# EAGLE board final_rev_no_smd (EAGLE 9.5.2)
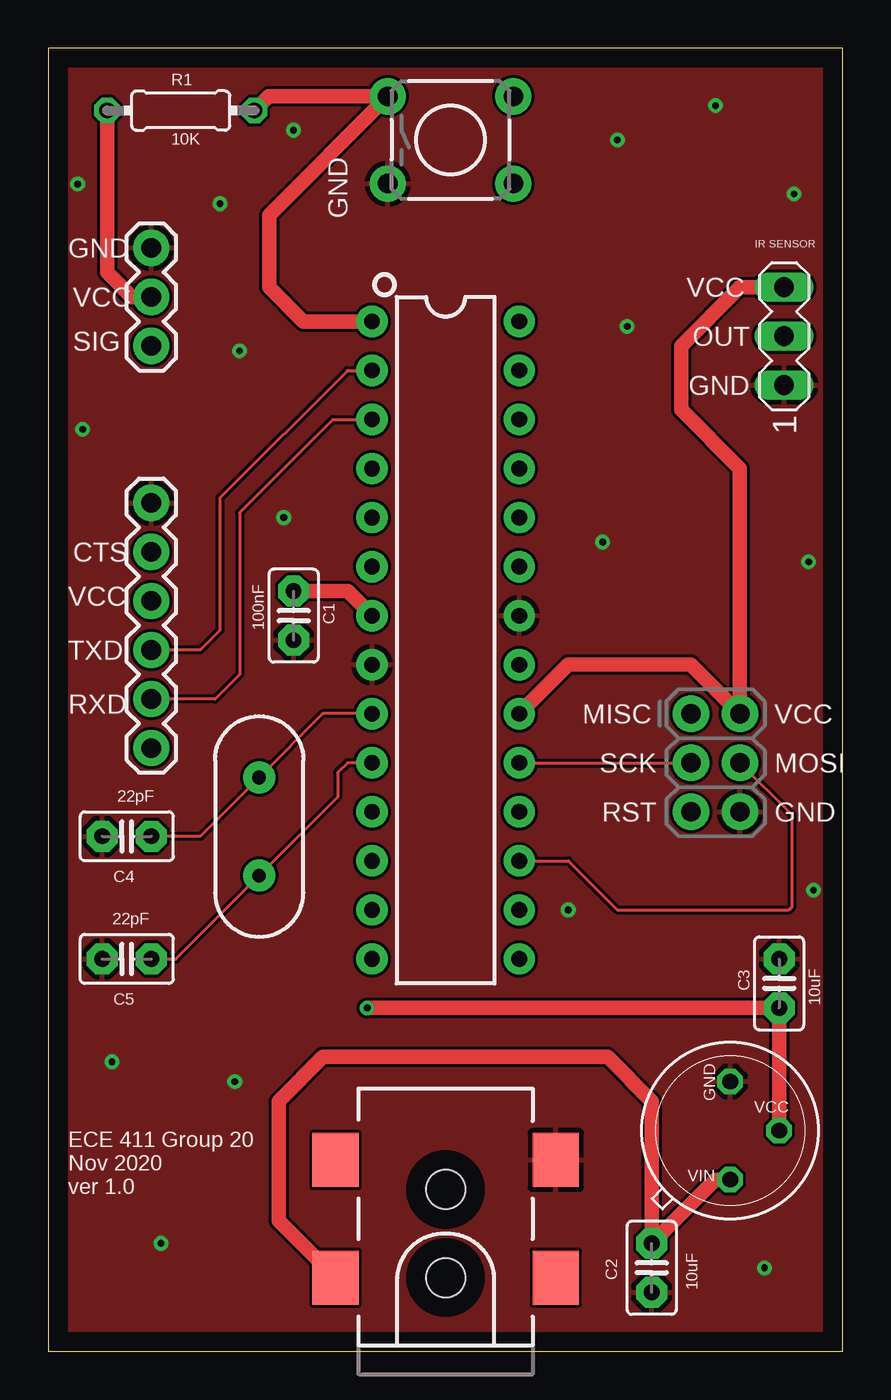
[diagram p0: board, top side]
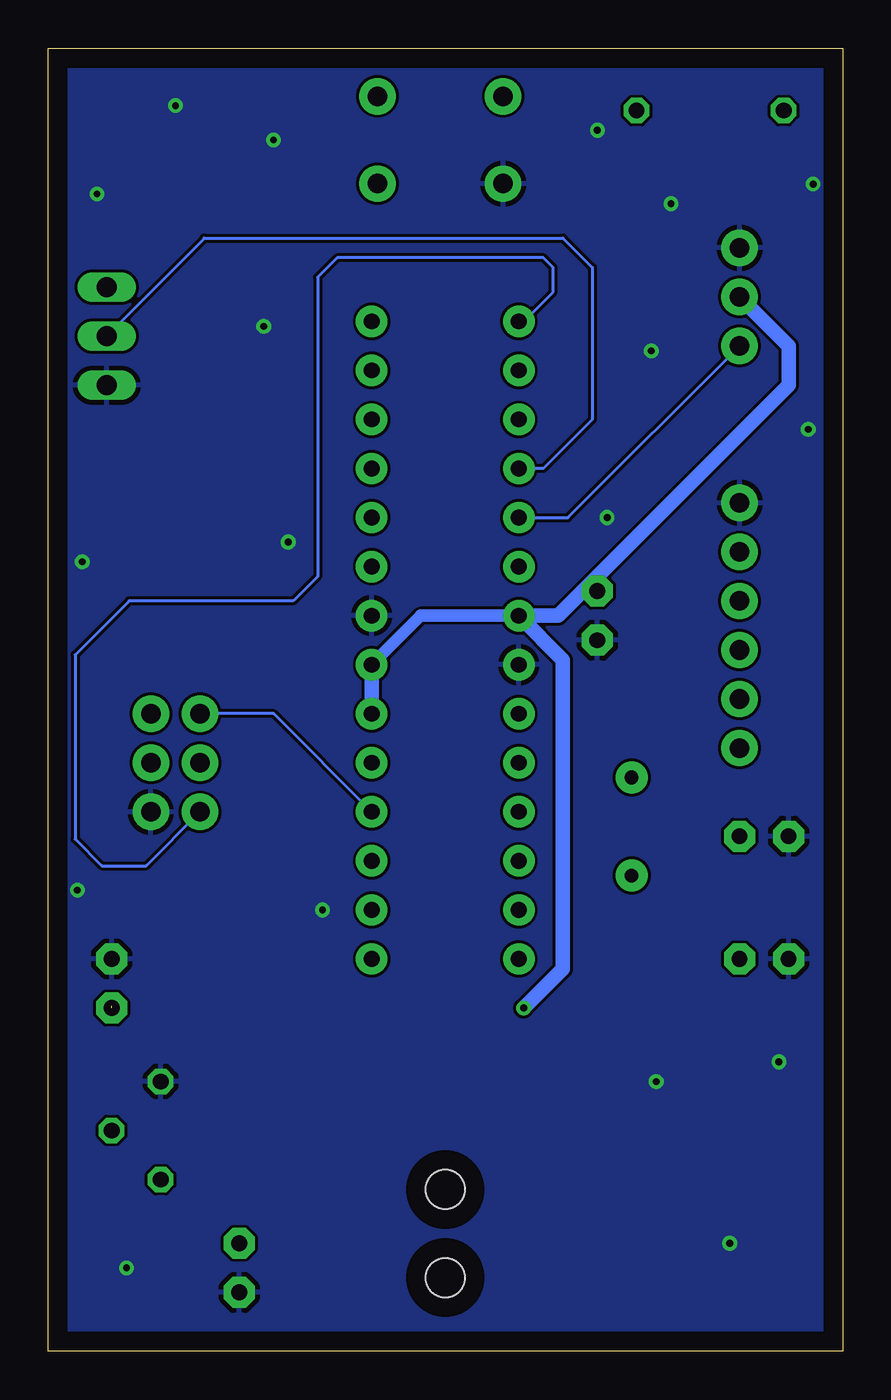
[diagram p1: board, bottom side, seen from below]

Size 41.13 x 67.49 mm. Coordinates in mm from the lower left corner, seen from the top.
Outline: 0,0 41.13,0 41.13,67.49 0,67.49 0,0
Copper layers (1*16): Top 0.035mm / dielectric 1.5mm / Bottom 0.035mm
Design rules "default": minimum track width 6mil, minimum drill 0.35mm, track to track 6mil, track to pad 6mil, pad to pad 6mil, via to via 6mil, smd to smd 6mil, copper to edge 40mil, drill to drill 6mil, minimum pad ring 10mil, minimum via ring 8mil, stop-mask expansion 4mil, vias tented up to drill 0mil, thermal gap 10mil

## Footprints (pad centres in the part's own frame; a part is rotated, then mirrored left to right if it is on the bottom)
C2.5-2 = drill 0.813 pad 1.6 octagon: 1 -1.27,0; 2 1.27,0
TO39 = drill 0.813 octagon: 1 0,-2.54; 2 2.54,0; 3 0,2.54
2X3-NS = drill 1.016 pad 1.88: 1 -2.54,-1.27; 2 -2.54,1.27; 3 0,-1.27; 4 0,1.27; 5 2.54,-1.27; 6 2.54,1.27
FTDI_BASIC = drill 1.016 pad 1.88: CTS 10.16,0; DTR 0,0; GND 12.7,0; RXI 2.54,0; TXO 5.08,0; VCC 7.62,0
POWER_JACK_SMD = smd 2.8 x 2.4: GND 0,-5.7; P$4 6.1,-5.7; VIN0 0,5.7; VIN1 6.1,5.7 | hole 2.032: 0,0; 4.572,0
1X03 = drill 1.016 pad 1.88: 1 0,0; 2 2.54,0; 3 5.08,0
0204/7 = drill 0.813 octagon: 1 -3.81,0; 2 3.81,0
TACTILE_SWITCH_PTH_6.0MM = drill 1.016 pad 1.88: 1 -3.251,2.261; 2 3.251,2.261; 3 -3.251,-2.261; 4 3.251,-2.261
MA03-1 = drill 1.016 long: 1 -2.54,0; 2 0,0; 3 2.54,0
DIP28 = drill 0.813 pad 1.626: 1 -16.51,-3.81; 2 -13.97,-3.81; 3 -11.43,-3.81; 4 -8.89,-3.81; 5 -6.35,-3.81; 6 -3.81,-3.81; 7 -1.27,-3.81; 8 1.27,-3.81; 9 3.81,-3.81; 10 6.35,-3.81; 11 8.89,-3.81; 12 11.43,-3.81; 13 13.97,-3.81; 14 16.51,-3.81; 15 16.51,3.81; 16 13.97,3.81; 17 11.43,3.81; 18 8.89,3.81; 19 6.35,3.81; 20 3.81,3.81; 21 1.27,3.81; 22 -1.27,3.81; 23 -3.81,3.81; 24 -6.35,3.81; 25 -8.89,3.81; 26 -11.43,3.81; 27 -13.97,3.81; 28 -16.51,3.81
HC49US = drill 0.7 pad 1.651: 1 -2.54,0; 2 2.54,0

## Placement (x,y rotation side)
C1  [C2.5-2]  12.7,38.1 270 top
C2  [C2.5-2]  31.24,4.32 270 top
C3  [C2.5-2]  37.85,19.05 90 top
C4  [C2.5-2]  4.06,26.67 180 top
C5  [C2.5-2]  4.06,20.32 180 top
IC1  7805H  [TO39]  35.31,11.43 0 top
J1  AVR_SPI_PROG_3X2NS  [2X3-NS]  34.54,30.48 270 top
J2  6_PIN_SERIAL_CABLEPTH  [FTDI_BASIC]  5.33,31.24 90 top
J4  5.5x2.1mm Barrel  [POWER_JACK_SMD]  20.57,3.81 90 top
M1  SERVO  [1X03]  5.33,52.07 90 top
R1  [0204/7]  6.86,64.26 0 top
S1  MOMENTARY-SWITCH-SPST-PTH-6.0MM  [TACTILE_SWITCH_PTH_6.0MM]  20.83,62.74 0 top
SV1  [MA03-1]  38.1,52.58 90 top
U1  328P  [DIP28]  20.57,36.83 270 top
Y1  16MHz  [HC49US]  10.92,27.18 90 top

## Library data of the parts
C1-C5 = capacitor-wima
IC1 = adafruit
J1 J2 = SparkFun-Connectors
J4 = SparkFun-Connectors; PROD_ID: CONN-08106; SF_ID: PRT-12748
M1 = SparkFun-Electromechanical
R1 = rcl; SPICEPREFIX: R
S1 = SparkFun-Switches; PROD_ID: SWCH-08441; SF_SKU: COM-00097
SV1 = con-lstb; OC_FARNELL: unknown; OC_NEWARK: unknown
U1 = SparkFun-IC-Microcontroller; PROD_ID: IC-09136
Y1 = SparkFun-Clocks; PROD_ID: XTAL-08181; SF_ID: COM-00536

## Nets
GND: C1.2 C2.2 C3.2 C4.2 C5.2 IC1.3 J1.6 J2.GND J4.P$4 M1.3 S1.3 SV1.1 U1.8 U1.22
N$1: J1.5 R1.2 S1.1 U1.1
N$2: J2.TXO U1.2
N$3: J2.RXI U1.3
N$4: C4.1 U1.9 Y1.2
N$5: C5.1 U1.10 Y1.1
N$6: C2.1 IC1.1 J4.VIN0
N$7: SV1.2 U1.4
N$8: M1.1 U1.5
N$13: J1.3 U1.19
N$15: J1.1 U1.18
N$16: J1.4 U1.17
VCC: C1.1 C3.1 IC1.2 J1.2 M1.2 R1.1 SV1.3 U1.7 U1.20 U1.21

## Tracks (layer width: path | path; a pad name or v marks a point on that pad's centre or on a via)
GND  (via drill 0.35)
  other vias: 9.91,51.82 8.89,59.44 1.52,60.45 12.7,63.25 29.46,62.74 34.54,64.52 38.61,59.94 39.37,40.89 28.7,41.91 26.92,22.86 3.3,14.99 9.65,13.97 5.84,5.59 37.08,4.32 39.62,23.88 1.78,47.75 12.19,43.18 29.97,53.09
  pour Bottom: 0,67.31 0,0 41.15,0 41.15,67.31
  pour Top: 0,67.31 0,0 41.15,0 41.15,67.31
N$1
  Top 0.762: U1.1 13.21,53.34 11.43,55.12 11.43,58.85 S1.1 11.41,65 R1.2
  Bottom 0.152: J1.5 36.07,25.15 38.35,25.15 39.73,26.53 39.73,36.07 36.94,38.86 28.45,38.86 27.18,40.13 27.18,55.63 26.16,56.64 15.49,56.64 14.99,56.13 14.99,54.86 16.51,53.34 U1.1
N$2
  Top 0.152: U1.2 15.49,50.8 8.89,44.2 8.89,37.34 7.87,36.32 J2.TXO
N$3
  Top 0.152: U1.3 14.73,48.26 9.91,43.43 9.91,35.05 8.64,33.78 J2.RXI
N$4
  Top 0.152: U1.9 14.22,33.02 Y1.2 7.87,26.67 C4.1
N$5
  Top 0.152: U1.10 15.49,30.48 14.99,29.97 14.99,28.7 Y1.1 6.6,20.32 C5.1
N$6
  Top 0.762: J4.VIN0 11.94,6.75 11.94,12.95 14.22,15.24 28.96,15.24 31.24,12.95 C2.1 34.54,8.89 IC1.1
N$7
  Bottom 0.152: U1.4 15.49,45.72 12.95,48.26 12.95,56.13 14.48,57.66 33.06,57.66 33.06,57.62 SV1.2
N$8
  Bottom 0.152: U1.5 14.22,43.18 M1.1
N$13
  Top 0.152: U1.19 J1.3
N$15
  Bottom 0.152: U1.18 29.46,33.02 J1.1
N$16
  Top 0.152: U1.17 26.92,25.4 29.46,22.86 38.35,22.86 38.48,22.99 38.51,23.02 38.51,27.78 J1.4
VCC  (via drill 0.35)  (1 unrouted)
  Top 0.762: M1.2 4.32,54.61 3.05,55.88 R1.1 | 37.85,17.9 IC1.2 | U1.20 26.92,35.56 33.27,35.56 J1.2 35.81,45.72 32.77,48.77 32.77,52.07 35.81,55.12 SV1.3 | C3.1 v16.51,17.78 | C1.1 15.49,39.37 U1.7
  Bottom 0.635: U1.7 21.84,38.1 U1.21
  Bottom 0.762: U1.21 U1.20 | M1.2 2.79,52.07 2.79,50.04 14.73,38.1 U1.7 14.48,35.81 14.48,19.81 v16.51,17.78

## Text on the board
tPlace: GND | GND | VCC | VCC | OUT | SIG | GND | CTS | VCC | TXD | RXD | MISC | VCC | SCK | MOSI | RST | GND | GND | VCC | VIN | ECE 411 Group 20 / Nov 2020 / ver 1.0
tNames: 10K | IR SENSOR | 100nF | 22pF | 22pF | 10uF | 10uF